# EAGLE board Solenoid Driver (EAGLE 7.5.0)
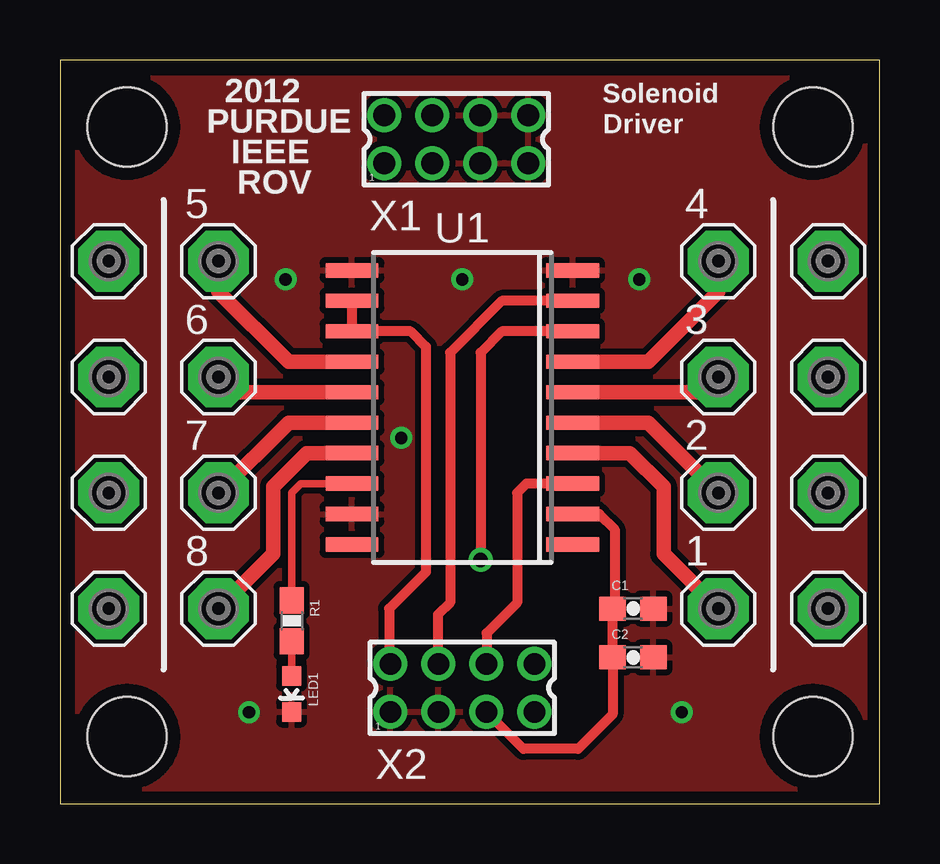
[diagram p0: board, top side]
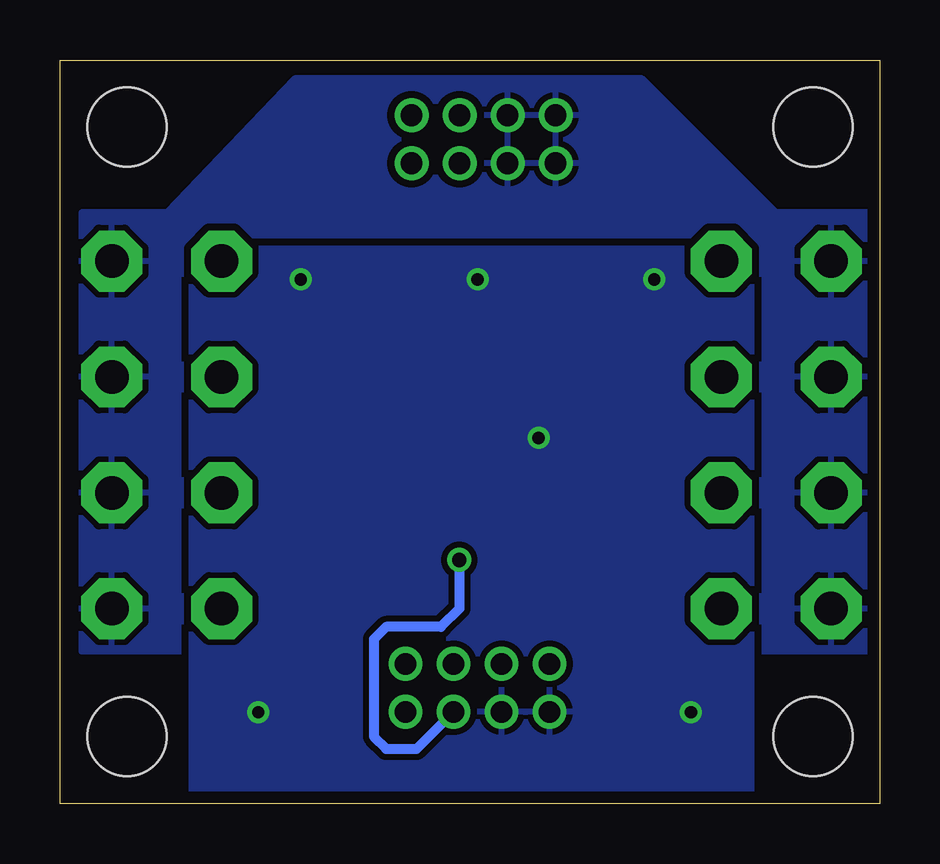
[diagram p1: board, bottom side, seen from below]

Size 34.16 x 30.99 mm. Coordinates in mm from the lower left corner, seen from the top.
Outline: 0,0 34.16,0 34.16,30.99 0,30.99 0,0
Copper layers (1*16): Top 0.0356mm / dielectric 1.5011mm / Bottom 0.0356mm
Design rules "default": minimum track width 7mil, minimum drill 14mil, track to track 7mil, track to pad 7mil, pad to pad 7mil, via to via 7mil, smd to smd 0mil, copper to edge 20mil, drill to drill 8mil, minimum pad ring 10mil, minimum via ring 8mil, stop-mask expansion 4mil, vias tented up to drill 25mil, thermal gap 10mil

## Footprints (pad centres in the part's own frame; a part is rotated, then mirrored left to right if it is on the bottom)
SE14 = drill 1.397 pad 2.54 octagon: MP 0,0
0603-CAP = smd 1.1 x 1: 1 -0.85,0; 2 0.85,0
STAND-OFF = hole 3.302: 0,0
LED-0603 = smd 0.8 x 0.8: A 0,-0.75; C 0,0.75
0603-RES = smd 1.1 x 1: 1 -0.85,0; 2 0.85,0
SOIC20-W = smd 0.6 x 2.2: 1 -5.715,-4.6; 2 -4.445,-4.6; 3 -3.175,-4.6; 4 -1.905,-4.6; 5 -0.635,-4.6; 6 0.635,-4.6; 7 1.905,-4.6; 8 3.175,-4.6; 9 4.445,-4.6; 10 5.715,-4.6; 11 5.715,4.6; 12 4.445,4.6; 13 3.175,4.6; 14 1.905,4.6; 15 0.635,4.6; 16 -0.635,4.6; 17 -1.905,4.6; 18 -3.175,4.6; 19 -4.445,4.6; 20 -5.715,4.6
87758-0816 = drill 0.9 pad 1.27: 1 -3,-1; 2 -3,1; 3 -1,-1; 4 -1,1; 5 1,-1; 6 1,1; 7 3,-1; 8 3,1

## Placement (x,y rotation side)
1  SE14  [SE14]  27.43,8.13 0 top
2  SE14  [SE14]  27.43,12.95 0 top
3  SE14  [SE14]  27.43,17.78 0 top
4  SE14  [SE14]  27.43,22.61 0 top
5  SE14  [SE14]  6.6,22.61 0 top
6  SE14  [SE14]  6.6,17.78 0 top
7  SE14  [SE14]  6.6,12.95 0 top
8  SE14  [SE14]  6.6,8.13 0 top
9  SE14  [SE14]  2.03,22.61 0 top
10  SE14  [SE14]  2.03,17.78 0 top
11  SE14  [SE14]  2.03,12.95 0 top
12  SE14  [SE14]  2.03,8.13 0 top
13  SE14  [SE14]  32,8.13 0 top
14  SE14  [SE14]  32,12.95 0 top
15  SE14  [SE14]  32,17.78 0 top
16  SE14  [SE14]  32,22.61 0 top
C1  0.1uF  [0603-CAP]  23.88,8.13 0 top
C2  10uF  [0603-CAP]  23.88,6.1 0 top
JP1  STAND-OFF  [STAND-OFF]  2.79,2.79 0 top
JP2  STAND-OFF  [STAND-OFF]  31.37,2.79 0 top
JP3  STAND-OFF  [STAND-OFF]  2.79,28.19 0 top
JP4  STAND-OFF  [STAND-OFF]  31.37,28.19 0 top
LED1  Orange  [LED-0603]  9.65,4.57 180 top
R1  330  [0603-RES]  9.65,7.62 270 top
U1  TPIC6A596  [SOIC20-W]  16.76,16.51 90 top
X1  87758-0816  [87758-0816]  16.51,27.69 0 top
X2  87758-0816  [87758-0816]  16.76,4.83 0 top

## Library data of the parts
1-16 = solpad
C1 C2 R1 = SparkFun-Passives
JP1-JP4 = SparkFun-Electromechanical
LED1 = SparkFun-LED
U1 = Personal
X1 X2 = con-molex; MF: MOLEX; MPN: 87758-0816; OC_FARNELL: 7472331; OC_NEWARK: 59J1556

## Nets
5V: C1.1 C2.1 U1.2 U1.8 X2.5
CLOCK: U1.12 U1.13 X2.2
ENABLE: U1.9 X2.4
GND: C1.2 C2.2 LED1.C U1.10 U1.11 U1.19 X1.5 X1.6 X1.7 X1.8 X2.1 X2.3
N$1: LED1.A R1.2
SER-IN: U1.3 X2.6
SER-OUT: R1.1 U1.18
SOL-1A: 1.MP U1.4
SOL-1B: 2.MP U1.5
SOL-2A: 3.MP U1.6
SOL-2B: 4.MP U1.7
SOL-3A: 5.MP U1.14
SOL-3B: 6.MP U1.15
SOL-4A: 7.MP U1.16
SOL-4B: 8.MP U1.17
VCC: 9.MP 10.MP 11.MP 12.MP 13.MP 14.MP 15.MP 16.MP X1.1 X1.2 X1.3 X1.4

## Tracks (layer width: path | path; a pad name or v marks a point on that pad's centre or on a via)
5V  (via drill 0.6)
  Top 0.406: U1.2 22.48,12.06 23.11,11.43 23.11,8.22 C1.1 C2.1 23.03,3.72 21.59,2.29 19.3,2.29 X2.5 | U1.8 18.41,19.68 17.53,18.8 v17.53,10.16
  Bottom 0.406: v17.53,10.16 17.53,8.13 18.29,7.37 20.57,7.37 21.08,6.86 21.08,2.79 20.57,2.29 19.3,2.29 X2.5
CLOCK
  Top 0.406: U1.12 U1.13 14.61,19.68 15.24,19.05 15.24,9.65 13.72,8.13 13.72,5.87 X2.2
ENABLE
  Top 0.406: U1.9 18.41,20.95 16.26,18.8 16.26,8.38 15.75,7.87 15.75,5.84 X2.4
GND  (via drill 0.51)
  other vias: 16.76,21.84 7.87,3.81 25.91,3.81 24.13,21.84 9.4,21.84 14.22,15.24
  pour Top (isolate 0.254): 0.76,30.23 33.53,30.23 33.53,0.51 0.76,0.51
  pour Bottom (isolate 0.254): 5.33,23.11 28.7,23.11 28.7,0.51 5.33,0.51
N$1
  Top 0.305: LED1.A R1.2
SER-IN
  Top 0.406: U1.3 19.43,13.34 19.05,12.95 19.05,8.38 17.78,7.11 17.78,5.84 X2.6
SER-OUT
  Top 0.305: U1.18 10.03,13.34 9.65,12.95 R1.1
SOL-1A
  Top 0.61: U1.4 23.75,14.61 25.15,13.21 25.15,10.41 1.MP
SOL-1B
  Top 0.61: U1.5 24.51,15.88 2.MP
SOL-2A
  Top 0.61: U1.6 26.8,17.14 3.MP
SOL-2B
  Top 0.61: U1.7 24.51,18.41 27.43,21.34 4.MP
SOL-3A
  Top 0.61: U1.14 9.53,18.41 6.6,21.34 5.MP
SOL-3B
  Top 0.61: U1.15 7.24,17.14 6.MP
SOL-4A
  Top 0.61: U1.16 9.53,15.88 7.MP
SOL-4B
  Top 0.61: U1.17 10.29,14.61 8.89,13.21 8.89,10.41 8.MP
VCC
  pour Bottom (isolate 0.305, rank 2): 0.51,6.35 0.51,24.64 4.32,24.64 9.91,30.23 24.38,30.23 29.72,24.64 33.27,24.64 33.27,6.35

## Text on the board
tPlace: 2012 | Solenoid | PURDUE | Driver | IEEE | ROV